# Altium PCB MotorController.PcbDoc
Units mil, origin at the board's own origin, x right, y up, seen from the top; angles counter-clockwise.
Board outline 3228.35 x 3062.99 mil, 2 copper layers (Top Layer, Bottom Layer); 56 components, 32 nets, 197 pads, 217 vias.
Unrouted connection lines stored in the file: 36.
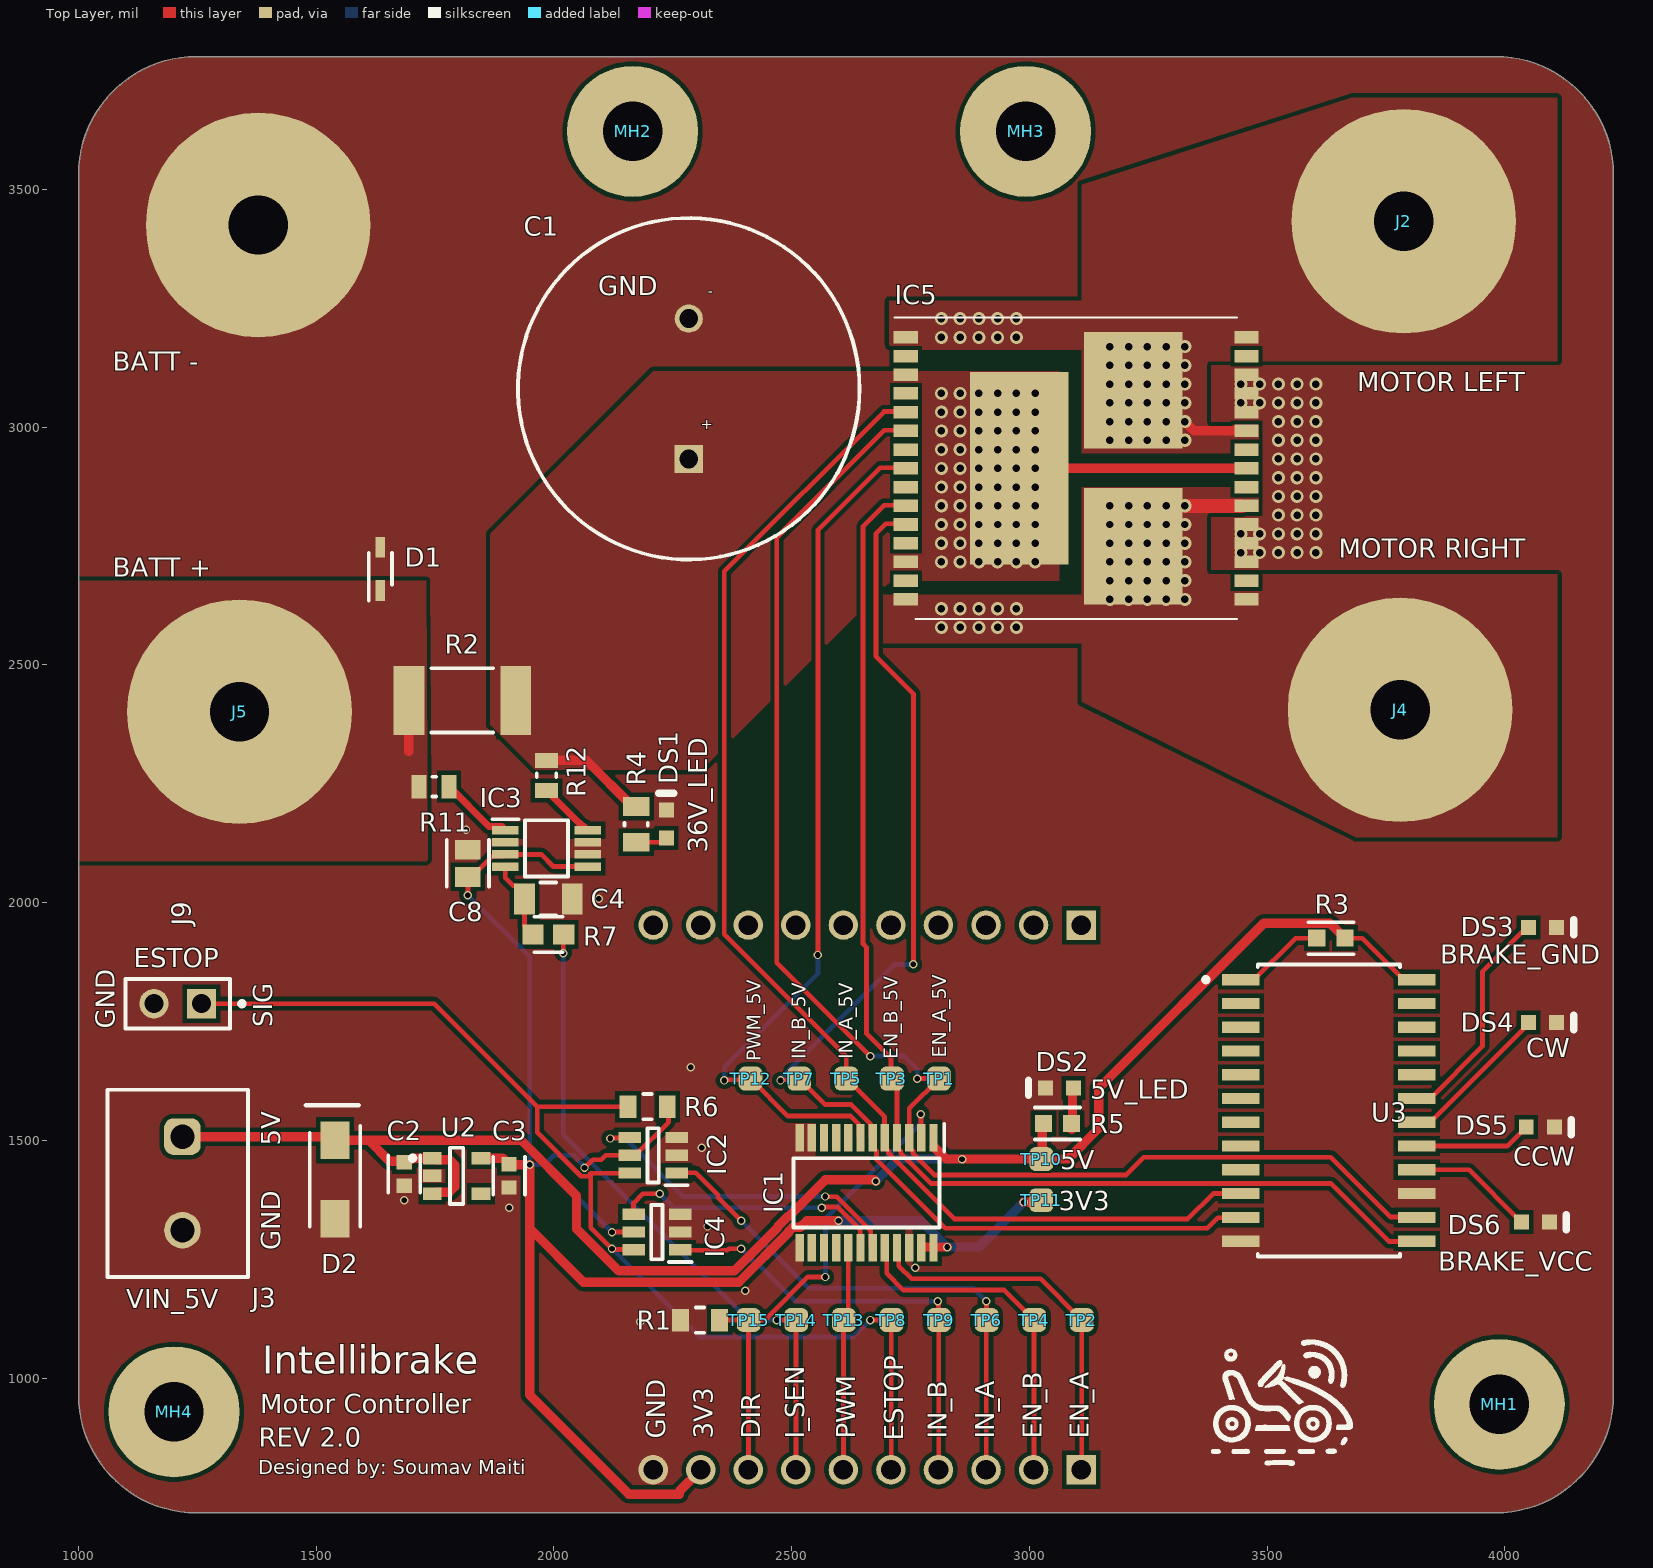
[diagram p0: Top Layer view]
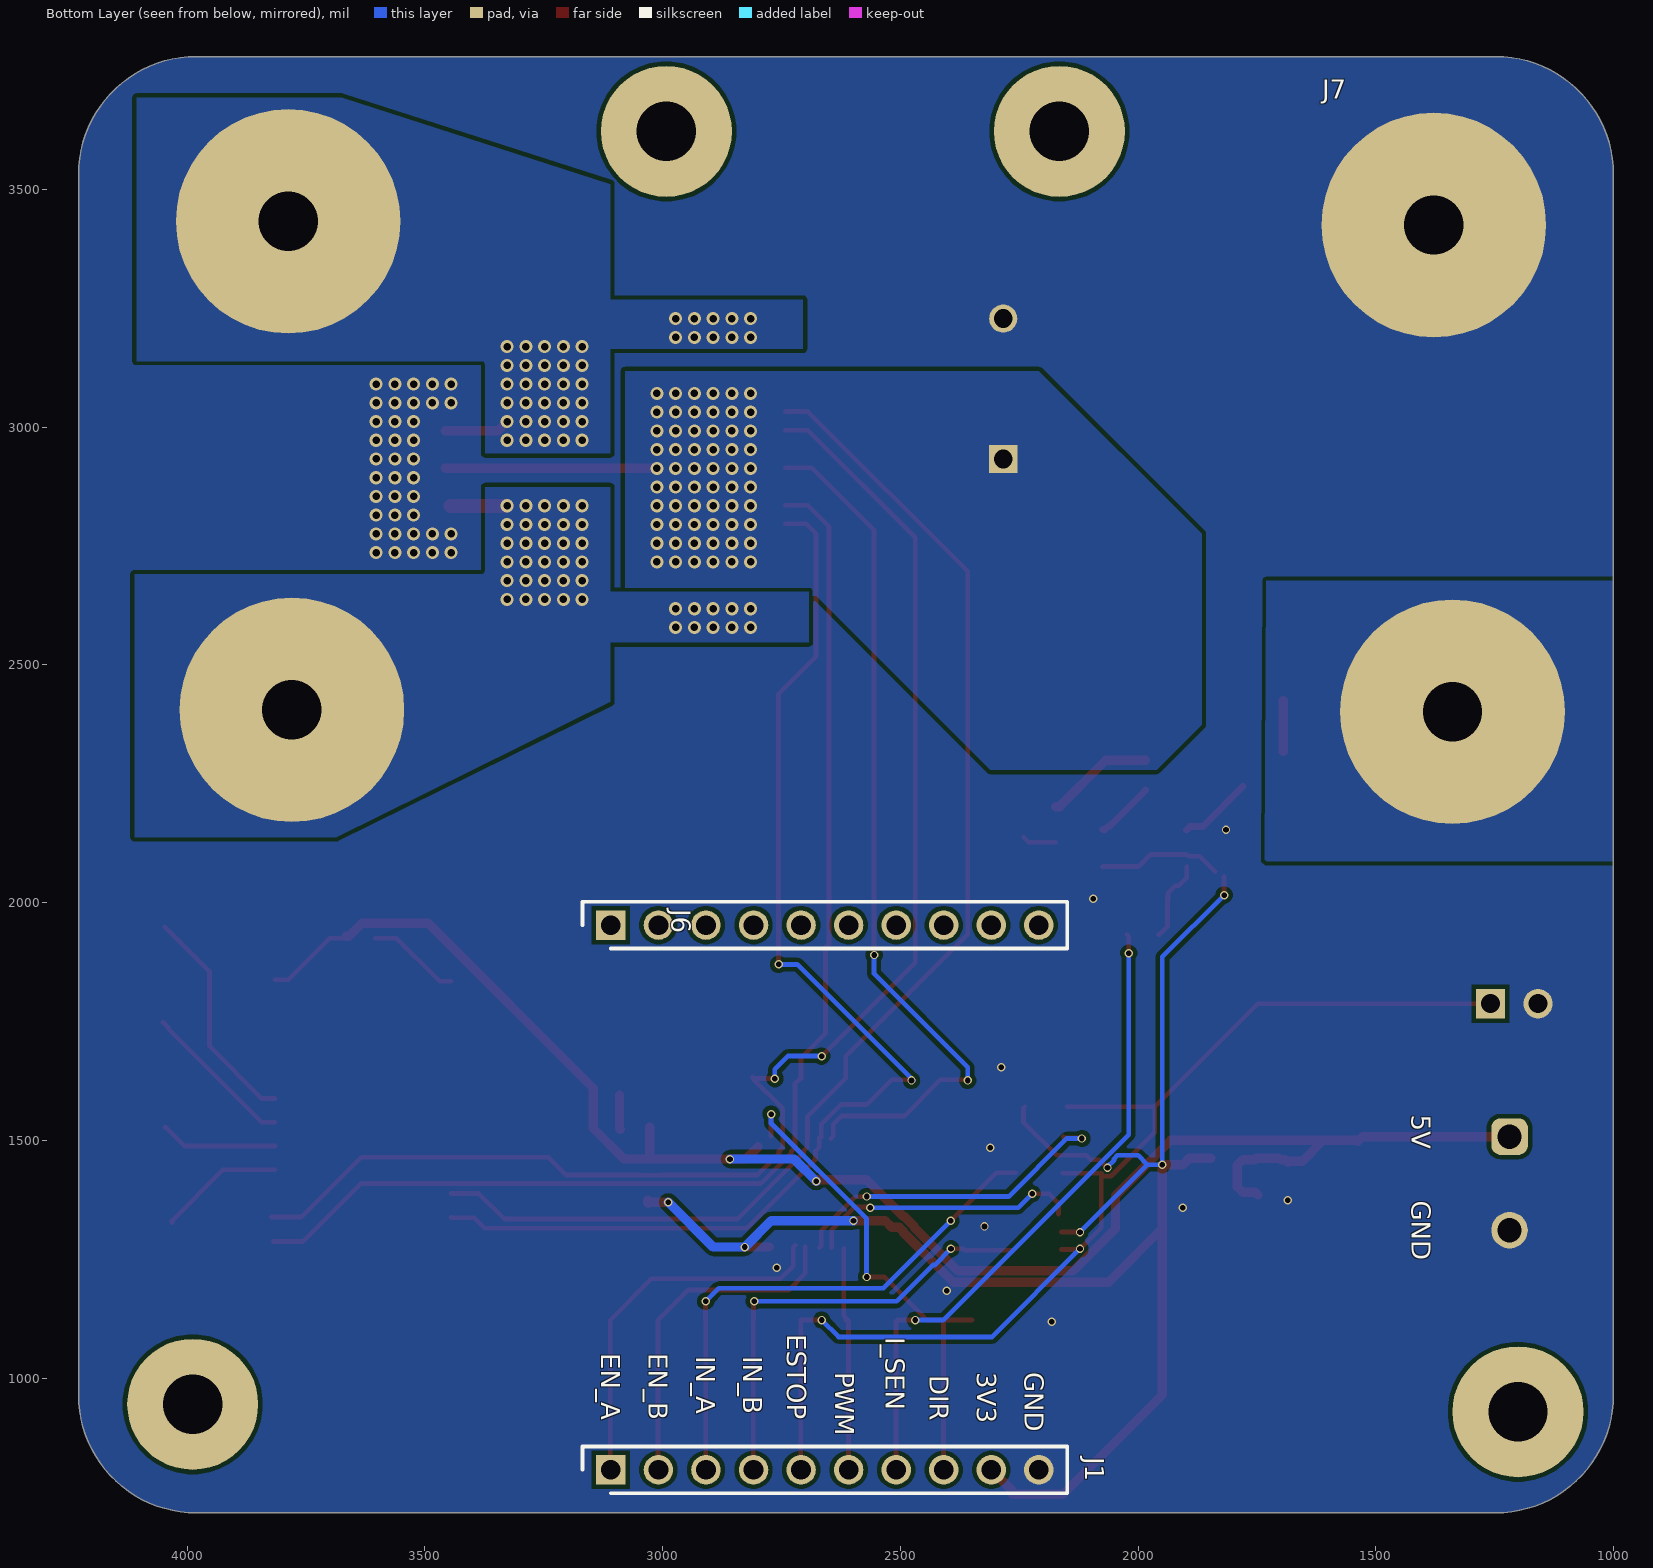
[diagram p1: Bottom Layer view, seen from below]
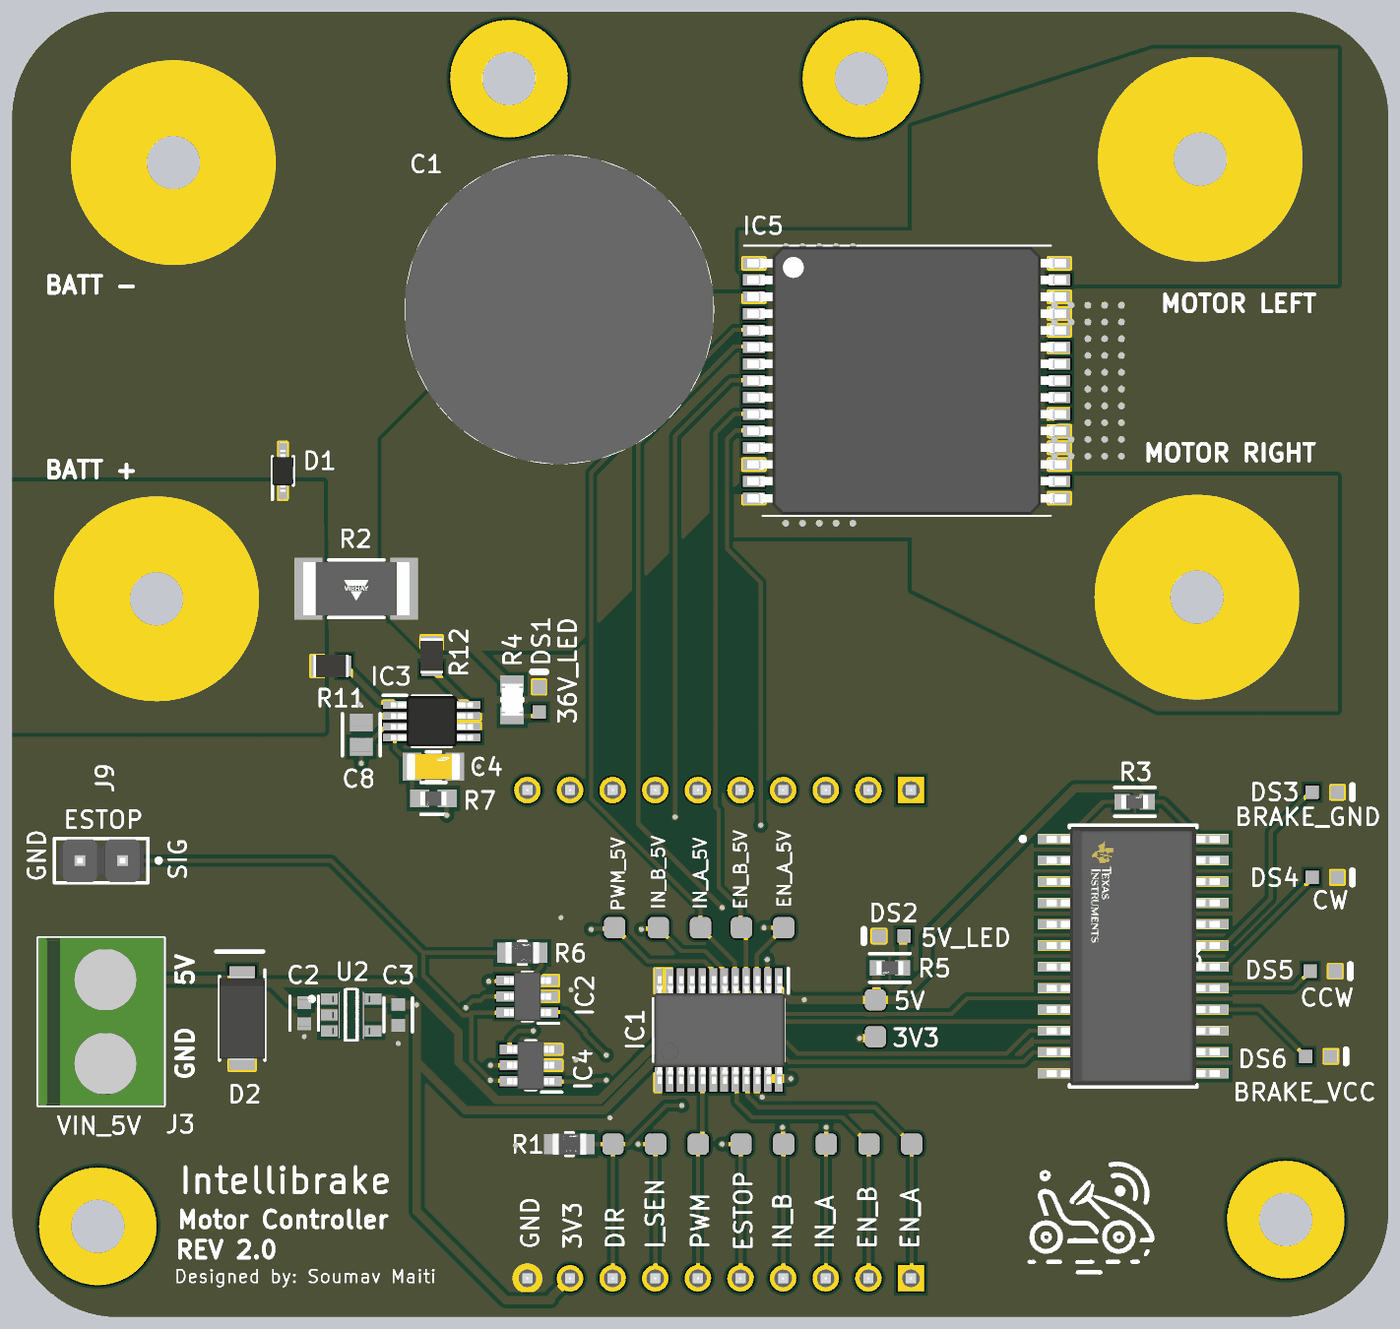
[diagram p2: 3D render of the assembled board from above, using the file's embedded part models]

## Layer stack, top to bottom
Top Solder: solder mask 0.4, Solder Resist, Dk 3.5
Top Layer: signal copper 1.4
Dielectric 1: dielectric 12.6, FR-4, Dk 4.8
Bottom Layer: signal copper 1.4
Bottom Solder: solder mask 0.4, Solder Resist, Dk 3.5

## Board outline
1248.03,716.54 3980.31,716.54 ccw(c3980.31,964.57) 4228.35,964.57 4228.35,3531.5 ccw(c3980.32,3531.5) 3980.31,3779.53 1248.03,3779.53 ccw(c1248.03,3531.5) 1000,3531.5 1000,964.57 ccw(c1248.03,964.57)

## Design rules (kind name [scope] priority, off if disabled: settings)
Clearance [All] p1: gap=3.94 ignorepadtopadclearanceinfootprint=FALSE except(8.86: Fill-Fill Fill-Poly Fill-Region Poly-Poly Poly-Region Region-Region)
Creepage [All] p1: checkdistance=7.87 applytopolygonpour=TRUE
DiffPairsRouting [All] p1: maxlimit=10 minlimit=10 mostfreqgap=10 toplayer_minwidth=15 toplayer_maxwidth=15 toplayer_prefwidth=15 bottomlayer_minwidth=15 bottomlayer_maxwidth=15 bottomlayer_prefwidth=15 maxuncoupledlength=500
Height [All] p1: minheight=0 maxheight=99999 prefheight=500
PlaneClearance [All] p1: clearance=7.87
PolygonConnect [All] p1: connectstyle=Direct reliefconductorwidth=10 reliefentries=4 polygonreliefangle="90 Angle" airgapwidth=10
RoutingVias [All] p1: holewidth=28 width=50 viastyle="Through Hole" minholewidth=28 minwidth=50 maxholewidth=28 maxwidth=50
SolderMaskExpansion [All] p1: expansion=4 istentingtop=FALSE
SupplyNets "Schematic Supply Nets_6" [InNet('MOTOR_L')] p1: voltage=0.000
SupplyNets "Schematic Supply Nets_5" [InNet('VBATT_36V')] p2: voltage=0.000
SupplyNets "Schematic Supply Nets_4" [InNet('VIN_5V')] p3: voltage=0.000
SupplyNets "Schematic Supply Nets_3" [InNet('MCU_3V3')] p4: voltage=0.000
SupplyNets "Schematic Supply Nets_2" [InNet('VBATT_IN_36V')] p5: voltage=0.000
SupplyNets "Schematic Supply Nets_1" [InNet('GND')] p6: voltage=0.000
SupplyNets "Schematic Supply Nets" [InNet('MOTOR_R')] p7: voltage=0.000
Width [All] p1: maxlimit=1181.1 minlimit=1.97 preferedwidth=10
27 further rules are at their usual default settings.

## Classes and differential pairs
component class VNH9013Y: C1 IC5 q
differential pair CSA: +CSA_P -CSA_N

## Components (designator, comment, footprint, x,y, rotation, side; value= is the part's Value field where it differs from the comment)
C1 "1200uF 63V" CAPPRD750W80D1825H3750 2283.46,2933.07 r90 top
C2 "1uF" FP-CL10-IPC_C 1685.04,1429.13 r270 top
C3 "1uF" FP-CL10-IPC_C 1905.51,1425.2 r270 top
C4 "100nF 50V" FP-CL31-IPC_C 1988.19,2007.87 r0 top
C8 "0.1uF 25V" FP-CL21-IPC_C 1818.9,2082.68 r90 top
D1 "ESD36VD3A-TP" SOD2512X115N 1634.83,2701.79 r90 top
D2 "P4SMAJ170A" DIOM5027X240N 1539.37,1417.32 r270 top
DS1 "HSMY-C190" AVAG-HSMX-C190_V 2236.22,2165.35 r90 top
DS2 "HSMY-C190" AVAG-HSMX-C190_V 3062.99,1610.24 r180 top
DS3 "HSMY-C190" AVAG-HSMX-C190_V 4079.41,1947.83 r0 top
DS4 "HSMY-C190" AVAG-HSMX-C190_V 4079.41,1747.83 r0 top
DS5 "HSMY-C190" AVAG-HSMX-C190_V 4074.41,1527.83 r0 top
DS6 "HSMY-C190" AVAG-HSMX-C190_V 4064.41,1327.83 r0 top
IC1 "74LVC4245APW,118" SOP65P640X110-24N 2657.48,1389.76 r270 top
IC2 "SN74LVC1G3157DBVR" SOT95P280X145-6N 2208.66,1468.5 r180 top
IC3 "INA225AIDGKR" SOP65P490X110-8N 1984.25,2114.17 r0 top
IC4 "SN74LVC1G3157DBVR" SOT95P280X145-6N 2216.54,1307.09 r180 top
IC5 "VNH3SP30TR-E" MULTIPOWERSO-30 3098.43,2913.39 r270 top
J1 "61301011821" RHDR10W60P0X254_1X10_2590X250X850P 3108.66,807.09 r180 bottom locked
J2 "J?" "Power Screw Terminal" 3787.4,3433.07 r0 top
J3 "691137710002" 691137710002 1208.66,1409.45 r270 top
J4 "J?" "Power Screw Terminal" 3779.53,2405.51 r0 top
J5 "J?" "Power Screw Terminal" 1338.58,2401.57 r0 top
J6 "61301011821" RHDR10W60P0X254_1X10_2590X250X850P 3108.66,1952.76 r180 bottom locked
J7 "J?" "Power Screw Terminal" 1377.95,3425.2 r0 bottom
J9 "M20-9990246" FP-M20-9990246-MFG 1208.66,1787.4 r180 top
MH1 "MH?" "Mounting Hole" 3983.19,944.88 r0 top
MH2 "MH?" "Mounting Hole" 2160.35,3622.05 r0 top
MH3 "MH?" "Mounting Hole" 2987.13,3622.05 r0 top
MH4 "MH?" "Mounting Hole" 1195.79,929.13 r0 top
R1 "4.7kΩ" FP-RT0805-MFG 2307.09,1122.05 r0 top value=4.7KΩ
R2 "1mOhm 2W" FP-WSL2512-MFG 1807.09,2425.2 r0 top
R3 "1.5k" FP-RC1608-IPC_B 3633.86,1925.2 r0 top
R4 "34k" FP-CRCW0805-e3-IPC_B 2172.83,2164.57 r90 top
R5 "1.5k" FP-RC1608-IPC_B 3059.06,1535.43 r180 top
R6 "4.7kΩ" FP-RT0805-MFG 2196.85,1570.87 r0 top value=4.7KΩ
R7 "1.5k" FP-CRCW0603-e3-IPC_A 1988.19,1933.07 r180 top
R11 "0Ohm" RESC2013X60X35LL10T20 1748.03,2244.09 r180 top
R12 "0Ohm" RESC2013X60X35LL10T20 1984.25,2267.72 r90 top
TP1 "TP" Testpoint 2809.9,1629.92 r90 top
TP2 "TP" Testpoint 3110.24,1122.05 r90 top
TP3 "TP" Testpoint 2710.77,1629.92 r180 top
TP4 "TP" Testpoint 3010.12,1122.05 r180 top
TP5 "TP" Testpoint 2614.88,1629.92 r180 top
TP6 "TP" Testpoint 2910.01,1122.05 r90 top
TP7 "TP" Testpoint 2515.75,1629.92 r90 top
TP8 "TP" Testpoint 2709.79,1122.05 r90 top
TP9 "TP" Testpoint 2809.9,1122.05 r180 top
TP10 "TP" Testpoint 3025.06,1460.63 r180 top
TP11 "TP" Testpoint 3025.06,1374.02 r180 top
TP12 "TP" Testpoint 2413.39,1629.92 r180 top
TP13 "TP" Testpoint 2609.67,1122.05 r90 top
TP14 "TP" Testpoint 2509.56,1122.05 r90 top
TP15 "TP" Testpoint 2409.45,1122.05 r90 top
U2 "MIC5504-3.3YM5-TR" FP-SOT23-5LD-PL-1-MFG 1795.28,1425.2 r0 top
U3 "CD74HC4067M96" FP-DW0024A-MFG 3629.92,1562.99 r0 top

## Footprints (in the part's own frame and the unit in brackets; to place one, negate y for a bottom-side part, rotate by r counter-clockwise, add the part's x,y. Pads: shape width x height; smd on the part's side, far side on the other; paste and mask are expansions set on the pad)
691137710002 [mm] "Horizontal Cable Entry with Pressure Clamp, pitch 5mm, 02p"
  rrect50% 1.95x1.95 hole 1.3: 1(-2.5,0.25)
  round 1.95 hole 1.3: 2(2.5,0.25)
  silkscreen extent -5,-3.75 5,3.75, body extent -5,-3.75 5,3.75, height 11.6
AVAG-HSMX-C190_V [mm] "SMD, 2-Leads, Body 1.6x0.8mm, Height 0.9mm"
  rect 0.8x0.8 smd: 1(-0.75,0) 2(0.75,0)
  silkscreen extent 1.65,-0.4 1.65,0.4, body extent -0.8,-0.4 0.8,0.4, height 0.9
CAPPRD750W80D1825H3750 [mm]
  rect 1.5x1.5 hole 1: 1(0,0)
  round 1.5 hole 1: 2(7.5,0)
  silkscreen extent -5.37,-9.13 12.87,9.12, body extent -5.5,-9.23 13,9.23, height 37.5
DIOM5027X240N [mm]
  rect 2x1.55 smd: 1(-2.1,0) 2(2.1,0)
  silkscreen extent -3.98,-1.55 2.5,1.35, body extent -2.5,-1.35 2.5,1.35, height 2.4
FP-CL10-IPC_C [mil]
  rect 29.85x31.97 smd paste+0 mask+0: 1(-24.68,0) 2(24.68,0)
  silkscreen extent -40,-33 40,33, body extent -44,-22 44,22, height 10
FP-CL21-IPC_C [mil]
  rect 41.52x53.39 smd paste+0 mask+0: 1(-28.57,0) 2(28.57,0)
  silkscreen extent -49,-44 49,44, body extent -53,-32 53,32, height 10
FP-CL31-IPC_C [mil]
  rect 43.52x65.28 smd paste+0 mask+0: 1(-50.25,0) 2(50.25,0)
  silkscreen extent -17,-34 17,34, body extent -76,-38 76,38, height 10
FP-CRCW0603-e3-IPC_A [mil]
  rect 44.69x41.82 smd paste+0 mask+0: 1(-32.1,0) 2(32.1,0)
  silkscreen extent -30,-37 30,37, body extent -74,-41 74,41, height 10
FP-CRCW0805-e3-IPC_B [mil]
  rect 39.63x55.44 smd paste+0 mask+0: 1(-37.44,0) 2(37.44,0)
  silkscreen extent -3,-25 3,25, body extent -67,-38 67,38, height 10
FP-DW0024A-MFG [mm]
  rect 2x0.6 smd paste-1000 mask+0: 1(-4.7,6.985) 2(-4.7,5.715) 3(-4.7,4.445) 4(-4.7,3.175) 5(-4.7,1.905) 6(-4.7,0.635) 7(-4.7,-0.635) 8(-4.7,-1.905) 9(-4.7,-3.175) 10(-4.7,-4.445) 11(-4.7,-5.715) 12(-4.7,-6.985) 13(4.7,-6.985) 14(4.7,-5.715) 15(4.7,-4.445) 16(4.7,-3.175) 17(4.7,-1.905) 18(4.7,-0.635) 19(4.7,0.635) 20(4.7,1.905) 21(4.7,3.175) 22(4.7,4.445) 23(4.7,5.715) 24(4.7,6.985)
  silkscreen extent -6.7,-7.8 3.8,7.8, body extent -5.8,-7.98 5.8,7.98, height 0.25
FP-M20-9990246-MFG [mm]
  rect 1.57x1.57 hole 1.02 paste-2539.97 mask+0: 1(-1.27,0)
  round 1.57 hole 1.02 paste-2539.97 mask+0: 2(1.27,0)
  silkscreen extent -3.55,-1.32 2.79,1.32, body extent -2.89,-1.42 2.89,1.42, height 0.25
FP-RC1608-IPC_B [mil]
  rect 35.81x35.91 smd paste+0 mask+0: 1(-29.58,0) 2(29.58,0)
  silkscreen extent -47,-34 47,34, body extent -57,-28 57,28, height 10
FP-RT0805-MFG [mm]
  rect 0.9x1.2 smd paste+0 mask+0: 1(-1.05,0) 2(1.05,0)
  silkscreen extent -0.23,-0.67 0.23,0.67, body extent -1.6,-0.77 1.6,0.77, height 0.25
FP-SOT23-5LD-PL-1-MFG [mm]
  rect 1x0.66 smd paste+0 mask+0: 1(-1.3,0.95) 2(-1.3,0) 3(-1.3,-0.95) 4(1.3,-0.95) 5(1.3,0.95)
  silkscreen extent -2.47,-1.5 0.35,1.5, body extent -1.9,-1.6 1.9,1.6, height 0.25
FP-WSL2512-MFG [mm]
  rect 1.65x3.68 smd paste+0 mask+0: 1(-2.855,0) 2(2.855,0)
  silkscreen extent -1.66,-1.72 1.66,1.72, body extent -3.78,-1.94 3.78,1.94, height 0.25
"Mounting Hole" [mm]
  round 7 hole 3.175: 4(0.127,0)
MULTIPOWERSO-30 [mm]
  rect 0.67x1.3 smd: 1(-7,-9.1) 2(-6,-9.1) 3(-5,-9.1) 4(-4,-9.1) 5(-3,-9.1) 6(-2,-9.1) 7(-1,-9.1) 8(0,-9.1) 9(1,-9.1) 10(2,-9.1) 11(3,-9.1) 12(4,-9.1) 13(5,-9.1) 14(6,-9.1) 15(7,-9.1) 16(7,9.1) 17(6,9.1) 18(5,9.1) 19(4,9.1) 20(3,9.1) 21(2,9.1) 22(1,9.1) 23(0,9.1) 24(-1,9.1) 25(-2,9.1) 26(-3,9.1) 27(-4,9.1) 28(-5,9.1) 29(-6,9.1) 30(-7,9.1)
  rect 10.3x5.25 smd: 31(0,-3.05)
  rect 6.23x5.25 smd: 32(-4.165,3.05) 33(4.165,3.05)
  silkscreen extent -8.05,-9.7 8.05,8.6, body extent -8,-9.5 8,9.5, height 2.15
"Power Screw Terminal" [mm]
  round 12 hole 3.175: 1(0,0)
RESC2013X60X35LL10T20 [mm] "Chip Resistor, 2-Leads, Body 2.1x1.35mm, IPC High Density"
  rect 0.8x1.25 smd: 1(-0.8,0) 2(0.8,0)
  silkscreen extent -0.1,-0.53 0.1,0.53, body extent -1.05,-0.67 1.05,0.68, height 0.6
RHDR10W60P0X254_1X10_2590X250X850P [mm]
  rect 1.575x1.575 hole 1.05: 1(0,0)
  round 1.575 hole 1.05: 2(2.54,0) 3(5.08,0) 4(7.62,0) 5(10.16,0) 6(12.7,0) 7(15.24,0) 8(17.78,0) 9(20.32,0) 10(22.86,0)
  silkscreen extent -1.52,-1.25 24.38,1.25, body extent -1.52,-1.25 24.38,1.25, height 8.5
SOD2512X115N [mm]
  rect 1.1x0.5 smd: 1(-1.15,0) 2(1.15,0)
  silkscreen extent -1.7,-0.63 0.85,0.63, body extent -1.25,-0.63 1.25,0.63, height 1.04
SOP65P490X110-8N [mm]
  rect 1.4x0.45 smd: 1(-2.2,0.975) 2(-2.2,0.325) 3(-2.2,-0.325) 4(-2.2,-0.975) 5(2.2,-0.975) 6(2.2,-0.325) 7(2.2,0.325) 8(2.2,0.975)
  silkscreen extent -2.9,-1.5 1.15,1.55, body extent -2.45,-1.5 2.45,1.5, height 1.1
SOP65P640X110-24N [mm]
  rect 1.475x0.45 smd: 1(-2.938,3.575) 2(-2.938,2.925) 3(-2.938,2.275) 4(-2.938,1.625) 5(-2.938,0.975) 6(-2.938,0.325) 7(-2.938,-0.325) 8(-2.938,-0.975) 9(-2.938,-1.625) 10(-2.938,-2.275) 11(-2.938,-2.925) 12(-2.938,-3.575) 13(2.938,-3.575) 14(2.938,-2.925) 15(2.938,-2.275) 16(2.938,-1.625) 17(2.938,-0.975) 18(2.938,-0.325) 19(2.938,0.325) 20(2.938,0.975) 21(2.938,1.625) 22(2.938,2.275) 23(2.938,2.925) 24(2.938,3.575)
  silkscreen extent -3.67,-3.9 1.85,4.15, body extent -3.21,-3.85 3.21,3.95, height 1
SOT95P280X145-6N [mm]
  rect 1.2x0.6 smd: 1(-1.25,0.95) 2(-1.25,0) 3(-1.25,-0.95) 4(1.25,-0.95) 5(1.25,0) 6(1.25,0.95)
  silkscreen extent -1.85,-1.45 0.3,1.6, body extent -1.4,-1.45 1.4,1.45, height 1.2
Testpoint [mil]
  rrect50% 50x50 smd: 0(0,0)

## Part data
C1: library part UHE1J122MHD6, "Capacitor Polarised", Manufacturer_Name=Nichicon, Mouser Part Number=647-UHE1J122MHD6, Supplier Part Number 1=493-1656-ND, Arrow Part Number=UHE1J122MHD6, Arrow Price/Stock=https://www.arrow.com/en/products/uhe1j122mhd6/nichicon, Datasheet Link=https://products.nichicon.co.jp/en/pdf/XJA043/e-uhe.pdf, Height=37.5mm, Manufacturer_Part_Number=UHE1J122MHD6, Mouser Price/Stock=https://www.mouser.co.uk/ProductDetail/Nichicon/UHE1J122MHD6?qs=3w7tHOhcdefSsEo8Zd8Pmw%3D%3D, Supplier 1=Digikey
C2 C3: library part CMP-13271-003399-1, "Cap Ceramic 1uF 10V X5R ±10% Pad SMD 0603 +85°C T/R", Case Code (Imperial)=0603, Case Code (Metric)=1608, Dielectric=X5R, Max Operating Temperature=85°C, Min Operating Temperature=-55°C, Package Quantity=1, Tolerance=10%, Voltage=10V, Capacitance=1uF, Case/Package=0603, Contact Plating=Tin, Depth=0.8mm, Height=0.8mm, Length=1.6mm, Mount="Surface Mount", Packaging="Tape and Reel", Radiation Hardening=No, Thickness=0.035inch, Voltage Rating=10V, Width=0.031inch
C4: library part CMP-13271-001276-1, "Cap Ceramic 100nF 50V X7R ±10% SMD 1206 +125°C Embossed T/R", Capacitance=100nF, Case Code (Imperial)=1206, Case Code (Metric)=3216, Dielectric=X7R, Max Operating Temperature=125°C, Min Operating Temperature=-55°C, Package Quantity=1, Tolerance=10%, Voltage Rating=50V, Case/Package=1206, Depth=1.6mm, Height=0.85mm, Length=0.126inch, Mount="Surface Mount", Packaging="Tape and Reel", Radiation Hardening=No, Thickness=0.037inch, Width=0.063inch
C8: library part CMP-13271-002094-1, "CL21 Series 0805 100nF 25V -20/+80% Tolerance Y5V Multilayer Ceramic Chip Capacitor", Capacitance=100nF, Case Code (Imperial)=0805, Case Code (Metric)=2012, Dielectric=Y5V, Max Operating Temperature=85°C, Min Operating Temperature=-30°C, Package Quantity=1, Tolerance=80%, Voltage Rating=25V, Case/Package=0805, Depth=1.25mm, Height=0.65mm, Lead Free="Lead Free", Length=2mm, Mount="Surface Mount", Packaging="Tape and Reel", Radiation Hardening=No, Thickness=0.03inch, Voltage Rating (DC)=25V, Width=0.049inch
D1: "Diode ESD (Uni-directional)", Manufacturer_Name=MCC, Datasheet Link=https://www.mccsemi.com/pdf/Products/ESD3V3D3A_ESD36VD3A(SOD-323).pdf, Height=1.15mm, Manufacturer_Part_Number=ESD36VD3A-TP
D2: "TVS Diode (Uni-directional)", Manufacturer_Name=Diotec, Datasheet Link=https://diotec.com/request/datasheet/p4smaj65.pdf, Height=2.4mm, Manufacturer_Part_Number=P4SMAJ170A
DS1 DS2 DS3 DS4 DS5 DS6: library part CMP-1744-00003-1, "LED Uni-Color Yellow, 65 mW, 20 mA, -40 to 85 degC, 2-Pin SMD, RoHS, Tape and Reel", Case Code (Imperial)=0603, Case Code (Metric)=1608, Max Operating Temperature="155 degC", Min Operating Temperature="-55 degC", Package Quantity=5000, Power Rating="100 mW", Resistance="390 Ohm", Tolerance=1%, Voltage Rating="50 V", Case\Package=0603, ComponentLink1Description="Manufacturer URL", ComponentLink1URL=http://www.avagotech.com/, ComponentLink2Description=Datasheet, ComponentLink2URL=http://docs.avagotech.com/docs/AV02-0551EN, ComponentLink3Description="Package Specification", ComponentLink3URL=http://www.fairchildsemi.com/dwg/MA/MA03D.pdf, DatasheetVersion=Mar-12, Height="0.45 mm", Length="1.6 mm", Mount="Surface Mount", PackageDescription="2-Pin Surface Mount Device, Body 1.6 x 0.8 mm, Height 0.9 mm", PackageReference=HSMX-C190, Packaging="Tape and Reel", Pins=2, REACH SVHC="No SVHC", RoHSCompliant=true, Voltage Rating (DC)="50 V", Width="0.8 mm"
IC1: "Integrated Circuit", Manufacturer_Name=Nexperia, Mouser Part Number=771-74LVC4245APW-T, Arrow Part Number=74LVC4245APW,118, Arrow Price/Stock=https://www.arrow.com/en/products/74lvc4245apw118/nexperia?region=nac, Datasheet Link=https://assets.nexperia.com/documents/data-sheet/74LVC4245A.pdf, Height=1.1mm, Manufacturer_Part_Number=74LVC4245APW,118, Mouser Price/Stock=https://www.mouser.co.uk/ProductDetail/Nexperia/74LVC4245APW118?qs=me8TqzrmIYXtBCPNCA6vcg%3D%3D
IC2 IC4: "Integrated Circuit", Manufacturer_Name="Texas Instruments", Mouser Part Number=595-SN74LVC1G3157DBV, Arrow Part Number=SN74LVC1G3157DBVR, Arrow Price/Stock=https://www.arrow.com/en/products/sn74lvc1g3157dbvr/texas-instruments?utm_currency=USD&region=nac, Datasheet Link=http://componentsearchengine.com/Datasheets/1/SN74LVC1G3157DBVR.pdf, Height=1.45mm, Manufacturer_Part_Number=SN74LVC1G3157DBVR, Mouser Price/Stock=https://www.mouser.co.uk/ProductDetail/Texas-Instruments/SN74LVC1G3157DBVR?qs=PVVDbbWpW3ID6l2sElWeMw%3D%3D
IC3: "Integrated Circuit", Manufacturer_Name="Texas Instruments", Arrow Part Number=INA225AIDGKR, Arrow Price/Stock=https://www.arrow.com/en/products/ina225aidgkr/texas-instruments?region=nac, Datasheet Link=http://www.ti.com/lit/ds/symlink/ina225.pdf, Height=1.1mm, Manufacturer_Part_Number=INA225AIDGKR
IC5: "Integrated Circuit", Manufacturer_Name=STMicroelectronics, Mouser Part Number=511-VNH3SP30TR-E, Arrow Part Number=VNH3SP30TR-E, Arrow Price/Stock=https://www.arrow.com/en/products/vnh3sp30tr-e/stmicroelectronics?region=nac, Datasheet Link=http://www.st.com/web/en/resource/technical/document/datasheet/CD00134336.pdf, Manufacturer_Part_Number=VNH3SP30TR-E, Mouser Price/Stock=https://www.mouser.co.uk/ProductDetail/STMicroelectronics/VNH3SP30TR-E?qs=po45yt2pPpsUU4ftWFEieA%3D%3D
J1 J6: "Connector", Manufacturer_Name="Wurth Elektronik", Mouser Part Number=710-61301011821, Datasheet Link=http://katalog.we-online.de/em/datasheet/6130xx11821.pdf, Height=8.5mm, Manufacturer_Part_Number=61301011821, Mouser Price/Stock=https://www.mouser.co.uk/ProductDetail/Wurth-Elektronik/61301011821?qs=W%252B2sBeLta1ZhlLR0YCzonQ%3D%3D
J2 J4 J5 J7: library part "Screw Connector"
J3: library part CMP-1502-03324-2, Current Rating=16A, Max Operating Temperature=120°C, Min Operating Temperature=-30°C, Voltage Rating=300V, Contact Material="Nickel, Tin", Height=11.6mm, Lead Pitch=5mm, NexarPartId=78871135, Number Of Contacts=2, Number of Pins=2, Number Of Rows=1, Packaging=Box, RoHS=Non-Compliant
J9: library part CMP-15831-000009-1, "CONN HEADER VERT 2POS 2.54MM", Current Rating=3A, Manufacturer=Harwin, Temperature="-40°C to +105°C", Temperature Range High=+105°C, Temperature Range Low=-40°C, Automotive=No, Category=Conn, ComponentLink2Description=Datasheet, ComponentLink2URL=https://cdn.harwin.com/pdfs/M20-999.pdf, Conn Gender=Male, Conn Orientation=Vertical, Contact Material=Tin,Nickel, Device Class L1=Connectors, Device Class L2="Headers and Wire Housings", Device Class L3=unset, Digikey Description="CONN HEADER VERT 2POS 2.54MM", Height=8.99mm, Lead Free=Yes, Manufacturer Part Number=M20-9990246, Mouser Description="2.54mm (0.1\") Pitch SIL Vertical PC Tail Pin Header, 6.1mm mating pin height, tin, 2 contacts", Number Of Contacts=2, Number Of Rows=1, Octopart=https://octopart.com/m20-9990246-harwin-2590635, Package=M20-9990246, Pitch=2.54mm, RoHS=TRUE
MH1 MH2 MH3 MH4: library part "Mounting Hole"
R1 R6: library part CMP-03412-019393-1, "RES SMD 4.7K OHM 1% 1/8W 0805", Manufacturer=Yageo, Manufacturer Part Number=RT0805FRE074K7L, Package=RT0805, Power Rating=0.125W, Resistance=4.7KΩ, Temperature="-55°C to +155°C", Temperature Coefficient="50 ppm/°C", Temperature Range High=+155°C, Temperature Range Low=-55°C, Tolerance=0.0001, Voltage Rating=150V, Automotive=No, Category=Res, ComponentLink2Description=Datasheet, ComponentLink2URL=http://www.yageo.com/documents/recent/PYu-RT_1-to-0.01_RoHS_L_9.pdf, Composition="Thin Film", Device Class L1="Passive Components", Device Class L2=Resistors, Device Class L3="Chip SMD Resistors", Digikey Description="RES SMD 4.7K OHM 1% 1/8W 0805", Footprint Url=http://www.yageo.com/exep/pages/download/literatures/PYu-R_Mount_10.pdf, Height=0.6mm, Ipc Land Pattern Name=RESC200125X50, Lead Free=Yes, Mouser Description="Thin Film Resistors - SMD 1/8W 4.7K ohm 1% 50ppm", Octopart=https://octopart.com/rt0805fre074k7l-yageo-40047233, RoHS=TRUE, Series=RT
R2: library part CMP-00030-41947086-1, "WSL25121L000FEA18 Res Metal Strip 2512 0.001 Ohm 1% 2W ±275ppm/C Sulfur Resistant Pad SMD Automotive T/R", Case Code (Imperial)=2512, Case Code (Metric)=6432, Max Operating Temperature=170°C, Max Power Dissipation=2W, Min Operating Temperature=-65°C, Resistance=1mΩ, Temperature Coefficient=275ppm/°C, Tolerance=1%, Case/Package=2512, Composition="Metal Element", Contact Plating=Tin, Features="Moisture Resistant", Height=889µm, Lead Free="Lead Free", Length=6.35mm, NexarPartId=41947086, Number of Pins=2512, Number of Terminations=2, Packaging="Tape and Reel", Power Rating=2W, Radiation Hardening=No, RoHS=Compliant, Schedule B="8533210045, 8533210045", Termination=SMD/SMT, Weight=63.58798mg, Width=3.2mm
R3 R5: library part CMP-13261-004935-1, "Res Thick Film 0603 1.5kΩ 1% 0.1W ±100ppm/°C Molded SMD T/R", Case/Package=0603, Max Operating Temperature=155°C, Min Operating Temperature=-55°C, Power Rating=100mW, Resistance=1.5kR, Temperature Coefficient=100ppm/°C, Tolerance=1%, Voltage Rating (DC)=50V, Composition="Thick Film", Contact Plating=Tin, Depth=0.8mm, Lead Free="Lead Free", Length=1.6mm, Military Standard=Not, Packaging="Tape and Reel", Radiation Hardening=No, Width=800um
R4: library part CMP-2001-03837-2, "RES Thick Film, 34kΩ, 1%, 0.125W, 100ppm/°C, 0805", Case Code (Imperial)=0805, Case Code (Metric)=2012, Max Operating Temperature=155°C, Max Power Dissipation=125mW, Min Operating Temperature=-55°C, Package Quantity=10, Resistance=34kR, Temperature Coefficient=100ppm/°C, Tolerance=1%, Voltage Rating=150V, Case/Package=0805, Composition="Thick Film", Contact Plating=Tin, Depth=1.25mm, Features="Automotive AEC-Q200", Height=0.02inch, Lead Free="Lead Free", Length=2mm, Military Standard=Not, Number of Terminations=2, Packaging="Tape and Reel", Power Rating=125mW, Radiation Hardening=No, Termination=SMD/SMT, Voltage Rating (DC)=150V, Weight=0.000194oz, Width=0.049inch, Working Voltage=150V
R7: library part CMP-2000-02995-2, "RES Thick Film, 1.5kΩ, 1%, 0.1W, 100ppm/°C, 0603", Case Code (Imperial)=0603, Case Code (Metric)=1608, Max Operating Temperature=155°C, Max Power Dissipation=100mW, Min Operating Temperature=-55°C, Package Quantity=10, Resistance=1.5kR, Temperature Coefficient=100ppm/°C, Tolerance=1%, Voltage Rating=75V, Case/Package=0603, Composition="Thick Film", Contact Plating=Tin, Depth=0.85mm, Features="Automotive AEC-Q200", Height=0.45mm, Lead Free="Lead Free", Length=1.55mm, Military Standard=Not, Mount="Surface Mount", Number of Terminations=2, Packaging="Tape and Reel", Power Rating=100mW, Termination=SMD/SMT, Voltage Rating (DC)=75V, Weight=7.1E-05oz, Width=0.033inch, Working Voltage=75V
R11 R12: library part CMP-2000-06963-1, "Chip Resistor, 0 Ohm, +/- 5%, 125 mW, -55 to 155 degC, 0805 (2012 Metric), RoHS, Tape and Reel", Case Style=Molded, Manufacturer=Yageo, Operating Temp Range=-55Cto155C, Package / Case=0805, Package Description="2-Pin Surface Mounted Device, Body 2 x 1.25 mm", Power Rating(s)=NotRequiredW, Temperature Coefficient=NotRequired, Construction=Rectangular, Datasheet URL=http://www.yageo.com/documents/recent/PYu-RC_Group_51_RoHS_L_7.pdf, Datasheet Version="Rev. 7, 05/2017", Failure Rate=NotRequired, Manufacturer URL=http://www.yageo.com/, Military Standard=NotRequired, Mounting Technology=SurfaceMount, Package Reference=0805, Packaging=TapeandReel, Product Depth (mm)=1.25mm, Product Height (mm)=0.5mm, Product Length (mm)=2mm, Termination Style=NotRequired, Tolerance (+ or -)=NotRequired, Type=ThickFilm
TP1 TP2 TP3 TP4 TP5 TP6 TP7 TP8 TP9 TP10 TP11 TP12 TP13 TP14 TP15: library part Testpoint
U2: library part CMP-2000-07604-2, "IC REG LINEAR 3.3V 300MA SOT23-5", Case/Package=SOT-23-5, Dropout Voltage=380mV, Max Input Voltage=5.5V, Max Operating Temperature=125°C, Max Output Current=300mA, Min Input Voltage=2.5V, Min Operating Temperature=-40°C, Nominal Output Voltage=3.3V, Operating Supply Current=42uA, Power Supply Rejection Ratio (PSRR)=60dB, Quiescent Current=38uA, Accuracy=3%, Height=1.1mm, Length=2.9mm, Mount="Surface Mount", Number of Outputs=1, Number of Pins=5, Output Current=300mA, Output Type=Fixed, Output Voltage=3.3V, Packaging="Tape and Reel", REACH SVHC="No SVHC", Width=1.6mm
U3: library part CMP-04901-000007-1, "IC MUX/DEMUX 1X16 24SOIC", Ambient Temperature Range High=+125°C, Ambient Temperature Range Low=-55°C, Manufacturer="Texas Instruments", Max Junction Temp=+150°C, Max Supply Voltage=6V, Min Supply Voltage=2V, Package=DW0024A, Quiescent Current=8uA, Temperature="-55°C to +125°C", Automotive=No, Category=IC, ComponentLink2Description=Datasheet, ComponentLink2URL=http://www.ti.com/lit/ds/symlink/cd74hc4067.pdf, Device Class L1="Integrated Circuits (ICs)", Device Class L2="Logic ICs", Device Class L3=Multiplexers, Digikey Description="IC MUX/DEMUX 1X16 24SOIC", Height=2.65mm, Ipc Land Pattern Name=SOIC127P1030X265-24, Lead Free=Yes, Logic Function Desc=Non-Inverting, Manufacturer Part Number=CD74HC4067M96, Mouser Description="Multiplexer Switch ICs Hi-Spd CMOS 16Ch Anl Mltplxr/Demltplxr", Number of Circuits=1, Number Of Inputs=16, Number of Outputs=1, Octopart=https://octopart.com/cd74hc4067m96-texas+instruments-722802, Propagation Delay=6ns, RoHS=TRUE, Standoff Height=0.1mm, Temperature Range High=+125°C, Temperature Range Low=-55°C

## Via types
v1: diameter 27.56, hole 15.75, Top Layer to Bottom Layer, tented both sides, 178 vias
v2: diameter 17.72, hole 11.81, Top Layer to Bottom Layer, tented both sides, 39 vias

## Nets (pads, with @x,y where several pads share a name; then routed paths per layer and width w, separated by ;. In a path a pad name is that pad's centre, name@x,y a point inside that pad or via, vN(x,y) a via of type N, cw(c..) or ccw(c..) an arc to the next point about the centre after c; other vN are vias at no path point)
CSA_N: IC3.8 R12.1 | length 124.8
  Top Layer w15: R12.1 1991.75,2228.72 2041.15,2179.32 2060.41,2160.06 2063.37,2160.06 IC3.8 ; IC3.8@2071.24,2153.54 IC3.8@2074.8,2153.54
CSA_P: IC3.1 R11.1 | length 156
  Top Layer w15: R11.1 1863.56,2160.06 1890.14,2160.06 IC3.1
CURR_SENSE: J1.7 R7.1 TP14.0 | length 1387.3
  Top Layer w10: v2(2019.68,1893.7) 2019.68,1929.13 R7.1@2023.62,1933.07 ; v2(2468.5,1122.05) 2506.41,1122.05 2509.11,1119.35 2509.11,807.54 J1.7
  Bottom Layer w10: v2(2019.68,1893.7) 2019.68,1511.81 2409.45,1122.05 v2(2468.5,1122.05)
CURR_SENSE_NOFLT: C4.1 IC3.4 R7.2 | length 172.2
  Top Layer w10: IC3.4 1897.64,2051.93 1914.05,2035.52 1921.18,2035.52 1937.01,2019.69 C4.1@1937.01,2007.87 ; C4.1 1937.94,1949.78 1954.65,1933.07 R7.2@1956.69,1933.07
DIR: IC1.2 J1.8 R1.2 TP15.0 | length 1048.5
  Top Layer w10: R1.2 TP15.0 ; J1.8 2409.06,807.48 2409.06,1121.65 TP15.0 ; v2(2570.87,1212.6) 2533.89,1212.6 2450.71,1129.42 2450.71,1127.91 2444.85,1122.05 TP15.0 ; IC1.2@2771.65,1508.86 2772.15,1509.35 2772.15,1554.63 v2(2771.65,1555.12)
  Bottom Layer w10: v2(2570.87,1212.6) 2570.87,1334.65 2771.65,1535.43 v2(2771.65,1555.12)
EN_A: IC1.21 J1.1 TP2.0 | length 789.7
  Top Layer w10: IC1.21@2720.47,1279.53 2725.32,1274.68 2725.32,1235.31 2751.97,1208.66 3023.62,1208.66 TP2.0 ; J1.1 3110.24,808.66 TP2.0@3110.24,1118.11
EN_A_5V: IC1.3 IC5.6 TP1.0 U3.14 | length 3058.8
  Top Layer w10: v2(2665.35,1677.17) 2468.72,1873.8 2468.72,2767.93 2694.27,2993.48 IC5.6@2742.04,2993.48 ; v2(2763.78,1629.92) 2807.09,1629.92 TP1.0@2811.02,1633.86 ; TP1.0 2747.05,1567.07 IC1.3 2747.05,1485.26 2754.84,1477.46 2754.84,1472.7 2800.22,1427.32 3003.05,1427.32 3003.68,1426.69 3046.44,1426.69 3047.07,1427.32 3203.21,1427.32 3240.45,1464.57 3633.86,1464.57 3759.84,1338.58 U3.14@3822.83,1338.58
  Bottom Layer w10: v2(2665.35,1677.17) 2736.22,1677.17 2763.78,1649.61 v2(2763.78,1629.92)
EN_B: IC1.20 J1.2 TP4.0 | length 721.1
  Top Layer w10: IC1.20@2699.72,1276.65 2699.72,1220.4 2735.09,1185.04 2947.13,1185.04 TP4.0 ; J1.2 3009.39,807.82 TP4.0@3009.39,1120.53
EN_B_5V: IC1.4 IC5.10 TP3.0 U3.13 | length 2627.8
  Top Layer w10: TP3.0@2708.66,1629.92 2708.66,1673.23 2657.48,1724.41 2657.48,1905.51 2650,1912.99 2650,2791.73 2694.27,2836 IC5.10@2742.04,2836 ; TP3.0 2721.46,1619.23 IC1.4 2721.46,1485.26 2729.25,1477.46 2729.25,1472.7 2792.5,1409.45 3633.86,1409.45 3755.91,1287.4 U3.13@3818.9,1287.4
ESTOP: IC2.6 IC4.6 J1.5 J9.1 R6.1 TP8.0 | length 2478.9
  Top Layer w10: J9.1 1748.03,1787.4 1964.57,1570.87 ; 2077.33,1430.11 2077.33,1316.37 2123.03,1270.67 IC4.6@2160.99,1270.67 ; R6.1@2149.61,1570.87 1964.57,1570.87 ; IC2.6@2158.89,1430.55 2077.76,1430.55 2071.56,1424.35 2056.82,1424.35 1964.57,1516.6 1964.57,1570.87 ; v2(2665.35,1122.05) TP8.0@2708.66,1122.05 ; J1.5 2709.22,807.65 TP8.0@2709.22,1121.48
  Bottom Layer w10: v2(2122.05,1271.65) 2307.09,1086.61 2629.92,1086.61 v2(2665.35,1122.05)
GND: C1.2 C2.2 C3.2 C4.2 C8.2 D1.2 D2.2 DS1.2 DS2.2 DS3.2 DS4.2 DS5.2 DS6.2 IC1.11 IC1.12 IC1.13 IC1.22 IC2.2 IC2.3 IC3.2 IC3.6 IC3.7 IC4.2 IC4.3 IC5.18 IC5.19 IC5.20 IC5.26 IC5.27 IC5.28 J1.10 J3.2 J7.1 J9.2 R1.1 U2.2 U3.12 U3.15
  other v1: 3444.88,2736.22 3484.25,2736.22 3523.62,2736.22 3562.99,2736.22 3602.36,2736.22 3444.88,2775.59 3484.25,2775.59 3523.62,2775.59 3562.99,2775.59 3602.36,2775.59 3523.62,2814.96 3562.99,2814.96 3602.36,2814.96 3523.62,2854.33 3562.99,2854.33 3602.36,2854.33 3523.62,2893.7 3562.99,2893.7 3602.36,2893.7 3523.62,2933.07 3562.99,2933.07 3602.36,2933.07 3523.62,2972.44 3562.99,2972.44 3602.36,2972.44 3523.62,3011.81 3562.99,3011.81 3602.36,3011.81 3444.88,3051.18 3484.25,3051.18 3523.62,3051.18 3562.99,3051.18 3602.36,3051.18 3444.88,3090.55 3484.25,3090.55 3523.62,3090.55 3562.99,3090.55 3602.36,3090.55
  other v2: 2181.1,1118.11 2402.38,1183.71 2759.84,1232.28 2322.83,1318.9 1905.51,1358.27 1685.04,1374.02 2311.02,1484.25 2287.4,1653.54 2094.49,2007.87 1814.96,2153.54
IN_A: IC1.19 IC2.4 | length 707.1
  Top Layer w10: v2(2118.11,1503.94) 2119.09,1504.92 2154.53,1504.92 IC2.4@2157.48,1507.87 ; v2(2570.87,1381.89) 2571.56,1381.2 2594.72,1381.2 2666.42,1309.51 2666.42,1277.95 IC1.19
  Bottom Layer w10: v2(2118.11,1503.94) 2149.61,1503.94 2271.91,1381.63 2570.61,1381.63 v2(2570.87,1381.89)
IN_A_5V: IC1.5 IC5.5 TP5.0 U3.10 | length 2708.1
  Top Layer w10: TP5.0 2614.88,1676.46 2358.27,1933.07 2358.27,2696.85 2694.27,3032.85 IC5.5@2742.04,3032.85 ; TP5.0@2616.49,1628.3 2695.33,1549.47 IC1.5@2695.33,1505.46 ; IC1.5 2695.87,1485.26 2703.66,1477.46 2703.66,1472.7 2841.71,1334.65 3333.03,1334.65 3386.38,1387.99 U3.10
IN_A_MCU: IC2.1 J1.3 TP6.0 | length 1123
  Top Layer w10: IC2.1@2256.89,1432.09 2298.11,1432.09 2345.17,1385.03 2345.17,1379.24 v2(2393.7,1330.71) ; J1.3 2909.34,807.76 TP6.0@2909.34,1122.16 ; v2(2909.45,1161.42) 2909.73,1161.14 2909.73,1122.33 TP6.0
  Bottom Layer w10: v2(2393.7,1330.71) 2535.43,1188.98 2881.89,1188.98 v2(2909.45,1161.42)
IN_B: IC1.18 IC4.4 | length 579.7
  Top Layer w10: IC4.4 2167.32,1368.11 2187.1,1387.89 v2(2222.37,1387.89) ; v2(2562.99,1358.27) 2564.47,1359.74 2586,1359.74 2586.24,1359.98 2596.24,1359.98 2643.94,1312.27 2643.94,1274.84 IC1.18
  Bottom Layer w10: v2(2222.37,1387.89) 2251.99,1358.27 v2(2562.99,1358.27)
IN_B_5V: IC1.6 IC5.11 TP7.0 U3.11 | length 2542.3
  Top Layer w10: v2(2476.38,1625.98) 2477.85,1627.46 2518.21,1627.46 2570.32,1575.35 2625.3,1575.35 2666.42,1534.23 2666.42,1506.81 IC1.6@2669.29,1503.94 ; IC1.6 2670.28,1485.26 2678.07,1477.46 2678.07,1459.72 2822.83,1314.96 3374.02,1314.96 3396.37,1337.31 3444.2,1337.31 U3.11 ; IC5.11@2742.04,2796.63 2698.2,2796.63 2677.17,2775.59 2677.17,2518.21 2755.91,2439.47 v2(2755.91,1870.08)
  Bottom Layer w10: v2@2472.44,1625.98 2716.54,1870.08 v2(2755.91,1870.08)
IN_B_MCU: IC4.1 J1.4 TP9.0 | length 947.4
  Top Layer w10: IC4.1@2264.76,1268.7 2364.58,1268.7 2367.8,1271.91 v2(2393.44,1271.91) ; v2(2807.09,1161.42) 2808.49,1160.01 2808.49,1123.45 TP9.0 ; J1.4 2809.28,807.71 TP9.0@2809.28,1124.24
  Bottom Layer w10: v2(2393.44,1271.91) 2427.74,1237.62 2431.67,1237.62 2507.87,1161.42 v2(2807.09,1161.42)
MCU_3V3: C3.1 C8.1 IC1.23 IC1.24 IC2.5 IC3.3 IC3.5 IC4.5 J1.9 R6.2 TP11.0 U2.5 | length 3906
  Top Layer w10: v2(1818.9,2015.75) C8.1@1818.9,2055.12 ; C8.1@1837.57,2064.77 1870.31,2097.52 1893.78,2097.52 IC3.3 1973.39,2101.38 1998.98,2075.79 2073.82,2075.79 IC3.5@2074.8,2074.8 ; v2(2064.19,1442.14) 2081.41,1459.37 2099.66,1459.37 2108.8,1468.5 IC2.5@2153.54,1468.5 ; v2(2122.05,1307.09) IC4.5@2161.42,1307.09 ; IC2.5 2171.26,1468.5 2240.86,1538.1 2240.86,1568.2 R6.2
  Top Layer w19.68: U2.5 1891.73,1462.6 1904.45,1449.88 C3.1 1906.57,1448.82 v2(1948.82,1448.82) 1948.82,1314.96 ; 2263.88,755.91 2157.48,755.91 1948.82,964.57 1948.82,1314.96 ; 2263.88,762.3 J1.9 ; v2(2598.43,1330.71) 2531.5,1330.71 2517.7,1316.91 2502.17,1316.91 2494.09,1308.84 2494.09,1307.14 2388.72,1201.77 2062.01,1201.77 1948.82,1314.96 ; IC1.23@2775.59,1275.59 v2(2826.77,1275.59) ; v2(2988.19,1370.08) TP11.0@3031.5,1370.08 ; TP11.0@3031.5,1367.58 TP11.0@3031.5,1374.02
  Bottom Layer w10: v2(1818.9,2015.75) 1948.82,1885.83 v2(1948.82,1448.82) 1980.31,1448.82 ; v2(2064.19,1442.14) 2064.19,1444.23 2050.35,1458.06 2050.35,1461.43 2043.28,1468.5 2000,1468.5 1980.31,1448.82 ; v2(2122.05,1307.09) 1980.31,1448.82
  Bottom Layer w19.68: v2(2598.43,1330.71) 2771.65,1330.71 v2(2826.77,1275.59) 2893.7,1275.59 v2(2988.19,1370.08)
MOTOR_L: IC5.1 IC5.25 IC5.30 IC5.32 J2.1 | length 138.1
  Top Layer w19.68: v1(3326.77,3011.81) 3346.46,2992.13 IC5.25
  other v1: 3169.29,2972.44 3208.66,2972.44 3248.03,2972.44 3287.4,2972.44 3326.77,2972.44 3169.29,3011.81 3208.66,3011.81 3248.03,3011.81 3287.4,3011.81 3169.29,3051.18 3208.66,3051.18 3248.03,3051.18 3287.4,3051.18 3326.77,3051.18 3169.29,3090.55 3208.66,3090.55 3248.03,3090.55 3287.4,3090.55 3326.77,3090.55 3169.29,3129.92 3208.66,3129.92 3248.03,3129.92 3287.4,3129.92 3326.77,3129.92 3169.29,3169.29 3208.66,3169.29 3248.03,3169.29 3287.4,3169.29 3326.77,3169.29 2814.96,3188.98 2854.33,3188.98 2893.7,3188.98 2933.07,3188.98 2972.44,3188.98 2814.96,3228.35 2854.33,3228.35 2893.7,3228.35 2933.07,3228.35 2972.44,3228.35
MOTOR_PWM: IC1.17 J1.6 TP13.0 | length 471.7
  Top Layer w10: J1.6 2609.17,807.59 2609.17,1117.04 TP13.0@2614.17,1122.05 ; TP13.0 2619.09,1131.47 IC1.17@2619.09,1272.64
MOTOR_PWM_5V: IC1.7 IC5.8 TP12.0 | length 1834.4
  Top Layer w10: v2(2358.27,1625.98) 2359.74,1627.46 2415.85,1627.46 2492.13,1551.18 2623.88,1551.18 2640.83,1534.23 2640.83,1508.78 IC1.7@2645.67,1503.94 ; v2(2555.12,1889.76) 2555.12,2783.46 2686.39,2914.74 IC5.8@2742.04,2914.74
  Bottom Layer w10: v2(2358.27,1625.98) 2358.27,1653.54 2555.12,1850.39 v2(2555.12,1889.76)
MOTOR_R: IC5.15 IC5.16 IC5.21 IC5.33 J4.1 | length 119.1
  Top Layer w29.53: v1(3326.77,2834.65) IC5.21@3445.87,2834.65
  other v1: 2814.96,2578.74 2854.33,2578.74 2893.7,2578.74 2933.07,2578.74 2972.44,2578.74 2814.96,2618.11 2854.33,2618.11 2893.7,2618.11 2933.07,2618.11 2972.44,2618.11 3169.29,2637.8 3208.66,2637.8 3248.03,2637.8 3287.4,2637.8 3326.77,2637.8 3169.29,2677.17 3208.66,2677.17 3248.03,2677.17 3287.4,2677.17 3326.77,2677.17 3169.29,2716.54 3208.66,2716.54 3248.03,2716.54 3287.4,2716.54 3326.77,2716.54 3169.29,2755.91 3208.66,2755.91 3248.03,2755.91 3287.4,2755.91 3326.77,2755.91 3169.29,2795.28 3208.66,2795.28 3248.03,2795.28 3287.4,2795.28 3326.77,2795.28 3169.29,2834.65 3208.66,2834.65 3248.03,2834.65 3287.4,2834.65
NetDS1_1: DS1.1 R4.1 | length 71.7
  Top Layer w10: R4.1 2229.49,2127.13 DS1.1@2240.16,2137.8
NetDS2_1: DS2.1 R5.1 | length 71.7
  Top Layer w19.68: R5.1@3088.63,1523.62 3090.57,1525.56 3090.57,1594.47
NetDS3_1: DS3.1 U3.19 | length 473.2
  Top Layer w10: U3.19 3842.52,1587.99 3952.76,1698.23 3952.76,1854.33 DS3.1@4047.24,1948.82
NetDS4_1: DS4.1 U3.18 | length 324.7
  Top Layer w10: U3.18 3842.52,1537.99 4039.14,1734.61 4039.14,1737.09 4050.08,1748.03 DS4.1@4051.18,1748.03
NetDS5_1: DS5.1 U3.17 | length 248.7
  Top Layer w10: U3.17 4005.04,1487.99 4044.61,1527.56 DS5.1@4047.24,1527.56
NetDS6_1: DS6.1 U3.16 | length 265.2
  Top Layer w10: U3.16 3924.73,1437.99 4031.5,1331.23 DS6.1@4031.5,1326.77
NetR3_1: R3.1 U3.1 | length 196.9
  Top Layer w10: U3.1@3444.88,1834.65 3469.09,1834.65 3559.65,1925.2 R3.1
VBATT_36V: C1.1 IC5.3 IC5.13 IC5.23 IC5.31 R2.2 R4.2 R12.2 | length 673.7
  Top Layer w19.68: R12.2 2067.72,2299.21 2164.93,2202 R4.2 ; v1(3011.81,2913.39) IC5.23
  other v1: 2814.96,2716.54 2854.33,2716.54 2893.7,2716.54 2933.07,2716.54 2972.44,2716.54 3011.81,2716.54 2814.96,2755.91 2854.33,2755.91 2893.7,2755.91 2933.07,2755.91 2972.44,2755.91 3011.81,2755.91 2814.96,2795.28 2854.33,2795.28 2893.7,2795.28 2933.07,2795.28 2972.44,2795.28 3011.81,2795.28 2814.96,2834.65 2854.33,2834.65 2893.7,2834.65 2933.07,2834.65 2972.44,2834.65 3011.81,2834.65 2814.96,2874.02 2854.33,2874.02 2893.7,2874.02 2933.07,2874.02 2972.44,2874.02 3011.81,2874.02 2814.96,2913.39 2854.33,2913.39 2893.7,2913.39 2933.07,2913.39 2972.44,2913.39 2814.96,2952.76 2854.33,2952.76 2893.7,2952.76 2933.07,2952.76 2972.44,2952.76 3011.81,2952.76 2814.96,2992.13 2854.33,2992.13 2893.7,2992.13 2933.07,2992.13 2972.44,2992.13 3011.81,2992.13 2814.96,3031.5 2854.33,3031.5 2893.7,3031.5 2933.07,3031.5 2972.44,3031.5 3011.81,3031.5 2814.96,3070.87 2854.33,3070.87 2893.7,3070.87 2933.07,3070.87 2972.44,3070.87 3011.81,3070.87
VBATT_IN_36V: D1.1 J5.1 R2.1 R11.2 | length 107.3
  Top Layer w19.68: 1694.68,2317.91 R2.1
VIN_5V: C2.1 D2.1 IC1.1 J3.1 R3.2 R5.2 TP10.0 U2.1 U2.3 U3.24 | length 3597.2
  Top Layer w10: R3.2@3661.42,1925.2 3700.2,1925.2 3787.4,1837.99 U3.24
  Top Layer w19.68: J3.1 1527.56,1507.87 D2.1@1537.4,1498.03 ; D2.1 1610.24,1500 ; U2.1 1702.72,1462.6 1699.02,1458.9 1690.12,1458.9 C2.1 1682.7,1456.16 1654.08,1456.16 1610.24,1500 ; U2.3@1748.03,1385.83 1753.15,1390.94 1779.81,1390.94 1791.34,1402.48 1791.34,1447.92 1779.81,1459.45 1753.94,1459.45 U2.1@1750.79,1462.6 ; v2(2676.66,1413.89) 2673.23,1417.32 2570.87,1417.32 2494.07,1340.53 2492.38,1340.53 2470.47,1318.62 2470.47,1316.93 2378.94,1225.39 2136.29,1225.39 2047.45,1314.24 2047.45,1383.6 1931.04,1500 1610.24,1500 ; IC1.1@2799.21,1486.24 2824.82,1460.63 v2(2858.27,1460.63) TP10.0 ; R5.2@3027.56,1527.56 3027.27,1527.27 3027.27,1462.84 TP10.0 ; R3.2@3665.35,1929.13 3659.55,1929.13 3631.75,1956.93 3493.15,1956.93 3145.67,1609.45 3145.67,1525.31 3080.99,1460.63 TP10.0
  Bottom Layer w19.68: v2(2676.66,1413.89) 2723.41,1460.63 v2(2858.27,1460.63)
pads on no net: IC1.8 IC1.9 IC1.10 IC1.14 IC1.15 IC1.16 IC5.2 IC5.4 IC5.7 IC5.9 IC5.12 IC5.14 IC5.17 IC5.22 IC5.24 IC5.29 J6.1 J6.2 J6.3 J6.4 J6.5 J6.6 J6.7 J6.8 J6.9 J6.10 MH1.4 MH2.4 MH3.4 MH4.4 U2.4 U3.2 U3.3 U3.4 U3.5 U3.6 U3.7 U3.8 U3.9 U3.20 U3.21 U3.22 U3.23

## Polygon pours and split planes (outlines as drawn)
GND on Top Layer "GND_L01_P024" (solid, remove dead copper, pour order 24): 1248.03,3779.53 3980.31,3779.53 cw(c3980.31,3531.5) 4228.35,3531.5 4228.35,964.57 cw(c3980.32,964.57) 3980.31,716.54 1248.03,716.54 cw(c1248.03,964.57) 1000,964.57 1000,3531.5 cw(c1248.03,3531.5)
GND on Top Layer "GND_L01_P005" (solid, remove dead copper, pour order 5): 3381.89,3129.92 3381.89,2699.66 4114.17,2699.66 4114.17,3129.92
VBATT_IN_36V on Top Layer "VBATT_IN_36V_L01_P016" (solid, pour order 16): 1731.2,2677.17 1000,2677.17 1000,2086.61 1734.46,2086.61
MOTOR_L on Top Layer "MOTOR_L_L01_P006" (solid, remove dead copper, pour order 6): 3677.17,3692.91 4110.24,3692.91 4110.24,2944.88 3110.24,2944.88 3110.24,3510.24
VBATT_36V on Top Layer "VBATT_36V_L01_P010" (solid, pour order 10): 3062.99,3118.11 2208.66,3118.11 1866.14,2775.59 1866.14,2374.02 1960.63,2279.53 2311.02,2279.53 2708.66,2677.17 3062.99,2677.17
MOTOR_L on Top Layer "MOTOR_L_L01_P017" (solid, pour order 17): 2704.72,3163.31 3437.01,3163.31 3437.01,3238.11 3409.45,3265.67 2704.72,3265.67
MOTOR_R on Top Layer "MOTOR_R_L01_P018" (solid, pour order 18): 2692.91,2545.2 3425.2,2545.2 3425.2,2620 3397.64,2647.56 2692.91,2647.56
MOTOR_R on Top Layer "MOTOR_R_L01_P022" (solid, remove dead copper, pour order 22): 3110.24,2874.02 3110.24,2422.21 3685.89,2137.8 4110.24,2137.8 4110.24,2874.02
GND on Bottom Layer "GND_L02_P021" (solid, remove dead copper, pour order 21): 1248.03,3779.53 3980.31,3779.53 cw(c3980.31,3531.5) 4228.35,3531.5 4228.35,964.57 cw(c3980.32,964.57) 3980.31,716.54 1248.03,716.54 cw(c1248.03,964.57) 1000,964.57 1000,3531.5 cw(c1248.03,3531.5)
MOTOR_R on Bottom Layer "MOTOR_R_L02_P007" (solid, remove dead copper, pour order 7): 3110.24,2874.02 3110.24,2422.21 3685.89,2137.8 4110.24,2137.8 4110.24,2874.02
MOTOR_R on Bottom Layer "MOTOR_R_L02_P009" (solid, pour order 9): 2692.91,2547.24 3444.88,2547.24 3444.88,2633.86 3425.2,2653.54 2692.91,2653.54
MOTOR_L on Bottom Layer "MOTOR_L_L02_P008" (solid, pour order 8): 2704.72,3165.35 3437.01,3165.35 3437.01,3240.16 3409.45,3267.72 2704.72,3267.72
GND on Bottom Layer "GND_L02_P001" (solid, remove dead copper, pour order 1): 3381.89,3129.92 3381.89,2699.66 4114.17,2699.66 4114.17,3129.92
VBATT_IN_36V on Bottom Layer "VBATT_IN_36V_L02_P015" (solid, pour order 15): 1729.8,2677.17 1000,2677.17 1000,2086.61 1733.07,2086.61
MOTOR_L on Bottom Layer "MOTOR_L_L02_P012" (solid, remove dead copper, pour order 12): 3674.04,3692.91 4106.3,3692.91 4106.3,2944.88 3110.24,2944.88 3110.24,3511.24
VBATT_36V on Bottom Layer "VBATT_36V_L02_P014" (solid, pour order 14): 3078.74,3118.11 2208.66,3118.11 1866.14,2775.59 1866.14,2374.02 1960.63,2279.53 2311.02,2279.53 2677.17,2645.67 3078.74,2645.67

## Silkscreen, mask and mechanical layers (free items; w line width, h text height)
Top Overlay:
  drawing of 20 lines, arcs and shapes, not listed
  text "-" at 2334.65,3301 h40 r180
  text "GND" at 2092.61,3277.65 h40
  text "BATT -" at 1071.65,3118.9 h40
  text "MOTOR LEFT" at 3689.76,3075.59 h40
  text "+" at 2334.65,3022.53 h40 r180
  text "MOTOR RIGHT" at 3650.39,2725.2 h40
  text "BATT +" at 1071.65,2685.83 h40
  text "36V_LED" at 2321.98,2104.43 h40 r90
  text "BRAKE_GND" at 3864.27,1870.93 h40
  text "ESTOP" at 1116.24,1864.27 h40
  text "SIG" at 1407.39,1738.28 h40 r90
  text "GND" at 1076.68,1734.35 h40 r90
  text "CW" at 4045.37,1675.29 h40
  text "EN_A_5V" at 2825,1674.02 h29.53 r90
  text "IN_B_5V" at 2529.73,1670.08 h29.53 r90
  text "IN_A_5V" at 2628.15,1670.08 h29.53 r90
  text "EN_B_5V" at 2722.64,1670.08 h29.53 r90
  text "PWM_5V" at 2435.24,1666.14 h29.53 r90
  text "5V_LED" at 3128.05,1587.47 h40
  text "5V" at 1424.41,1488.98 h40 r90
  text "CCW" at 4017.81,1446.94 h40
  text "5V" at 3065.06,1439.07 h40
  text "3V3" at 3061.12,1352.46 h40
  text "GND" at 1424.41,1268.5 h40 r90
  text "BRAKE_VCC" at 3860.33,1225.26 h40
  text "VIN_5V" at 1100.49,1146.52 h40
  text "Intellibrake" at 1386.61,1008.66 h59.06
  text "Motor Controller" at 1382.68,925.98 h40
  text "GND" at 2234.16,872.14 h40 r90
  text "3V3" at 2333.89,872.14 h40 r90
  text "DIR" at 2433.63,872.14 h40 r90
  text "I_SEN" at 2526.71,872.14 h40 r90
  text "PWM" at 2633.11,872.14 h40 r90
  text "IN_B" at 2825.92,872.14 h40 r90
  text "IN_A" at 2925.66,872.14 h40 r90
  text "EN_B" at 3025.39,872.14 h40 r90
  text "EN_A" at 3125.13,872.14 h40 r90
  text "ESTOP" at 2734.16,868.2 h40 r90
  text "REV 2.0" at 1378.74,855.12 h40
  text "Designed by: Soumav Maiti" at 1377.95,797.4 h30
Bottom Overlay:
  text "5V" at 1424.41,1554.33 h40 r90
  text "GND" at 1424.41,1373.23 h40 r90
  text "ESTOP" at 2738.09,1092.43 h40 r90
  text "I_SEN" at 2530.64,1085.76 h40 r90
  text "EN_B" at 3029.33,1052.44 h40 r90
  text "EN_A" at 3129.07,1052.44 h40 r90
  text "IN_B" at 2829.85,1045.77 h40 r90
  text "IN_A" at 2929.59,1045.77 h40 r90
  text "GND" at 2238.09,1012.45 h40 r90
  text "3V3" at 2337.83,1012.45 h40 r90
  text "PWM" at 2637.04,1012.45 h40 r90
  text "DIR" at 2437.57,1005.79 h40 r90